# Altium PCB 控制盒基板-布局备份.PcbDoc (part 1 of 2)
Units mil, origin at the board's own origin, x right, y up, seen from the top; angles counter-clockwise.
Board outline 12046.02 x 6189.14 mil, 4 copper layers (Top Layer, SGND, POWER, Bottom Layer); 371 components, 226 nets, 1114 pads, 72 vias.
Unrouted connection lines stored in the file: 329.
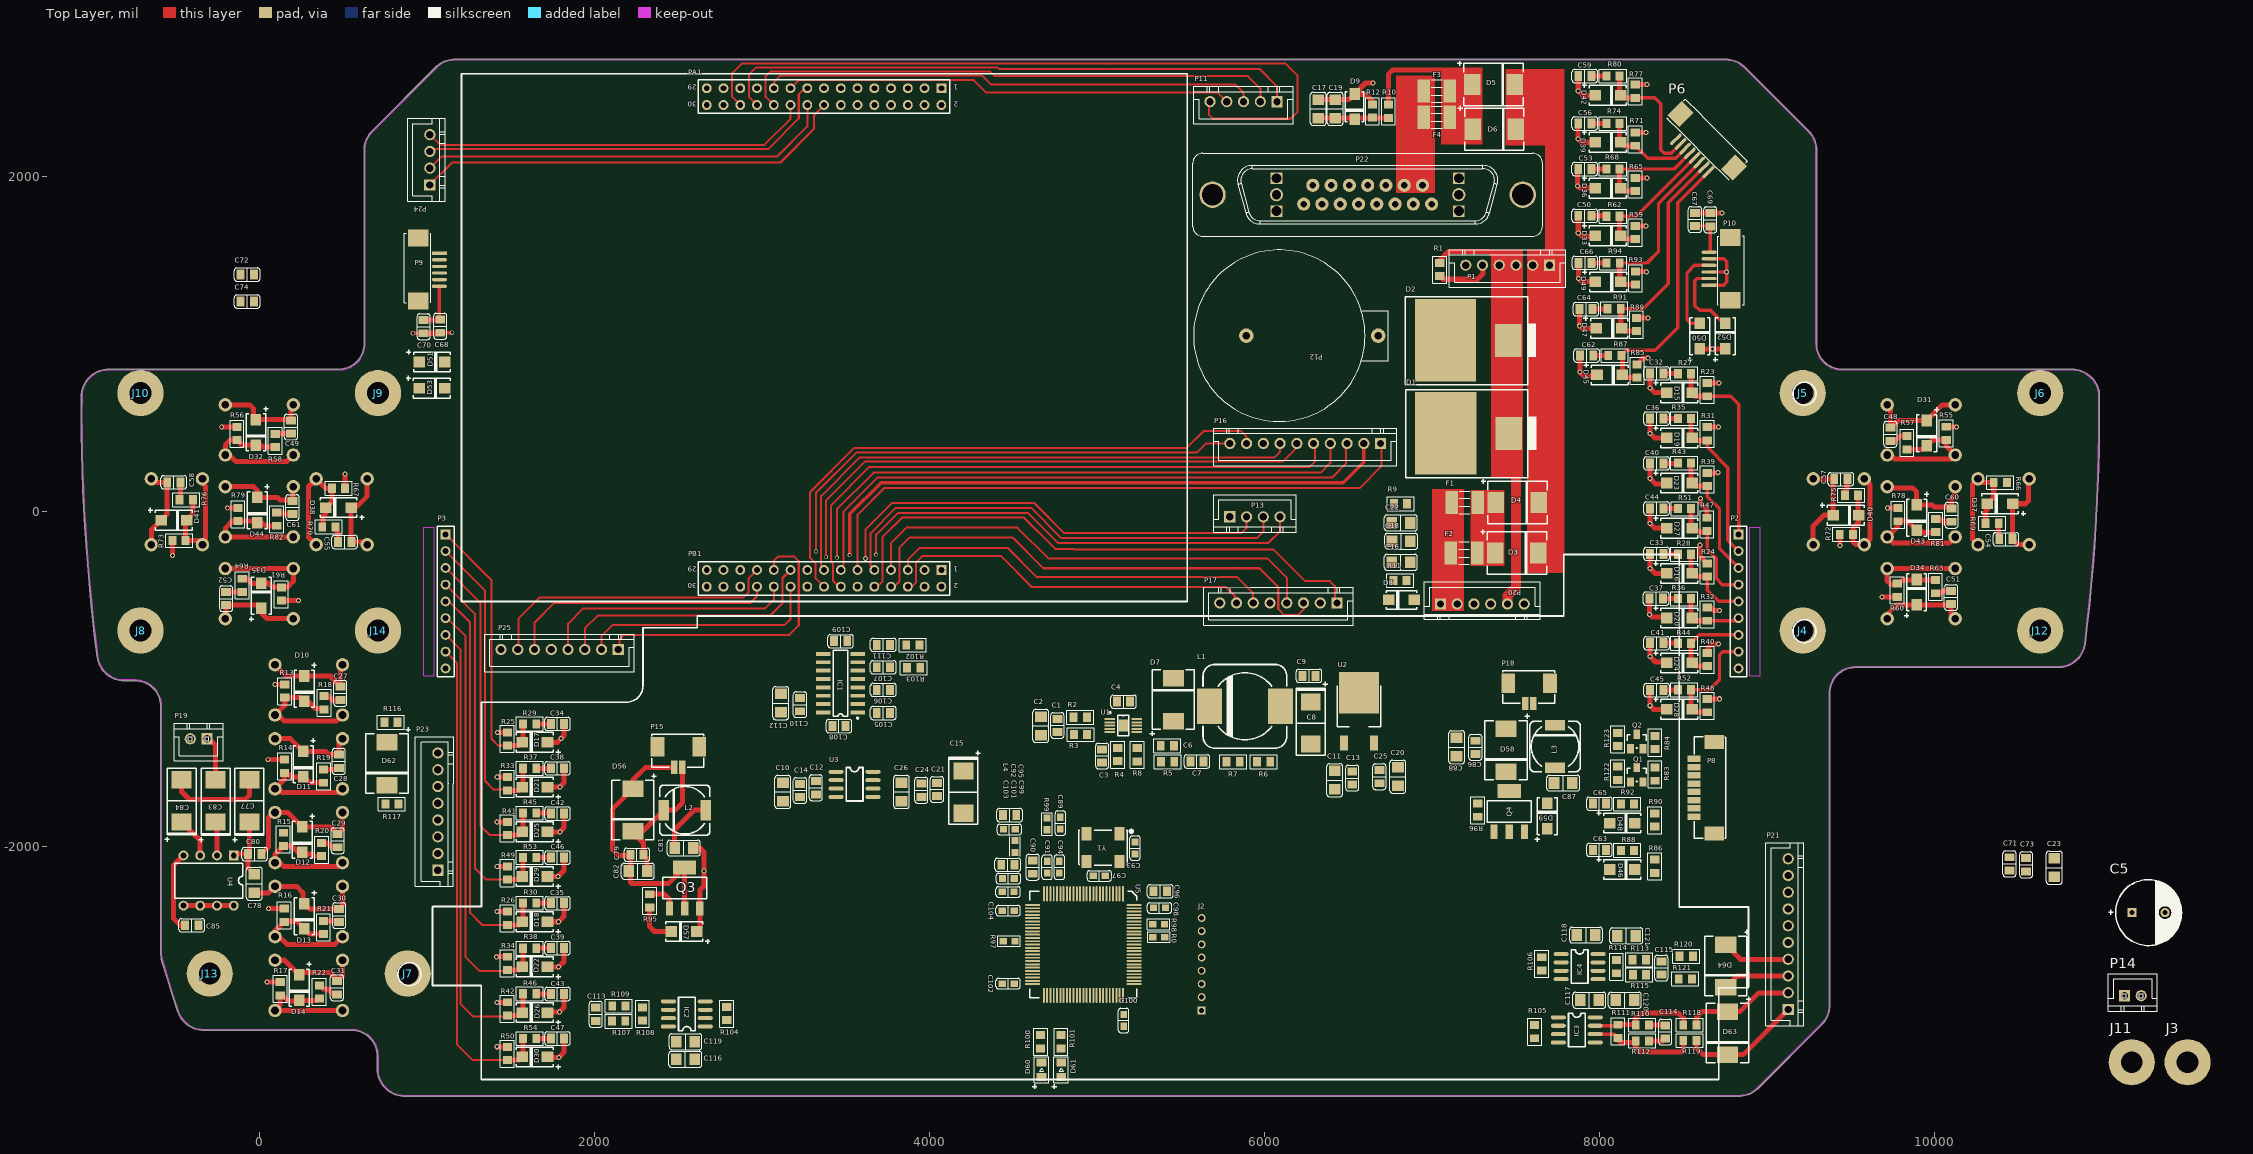
[diagram p0: Top Layer view]
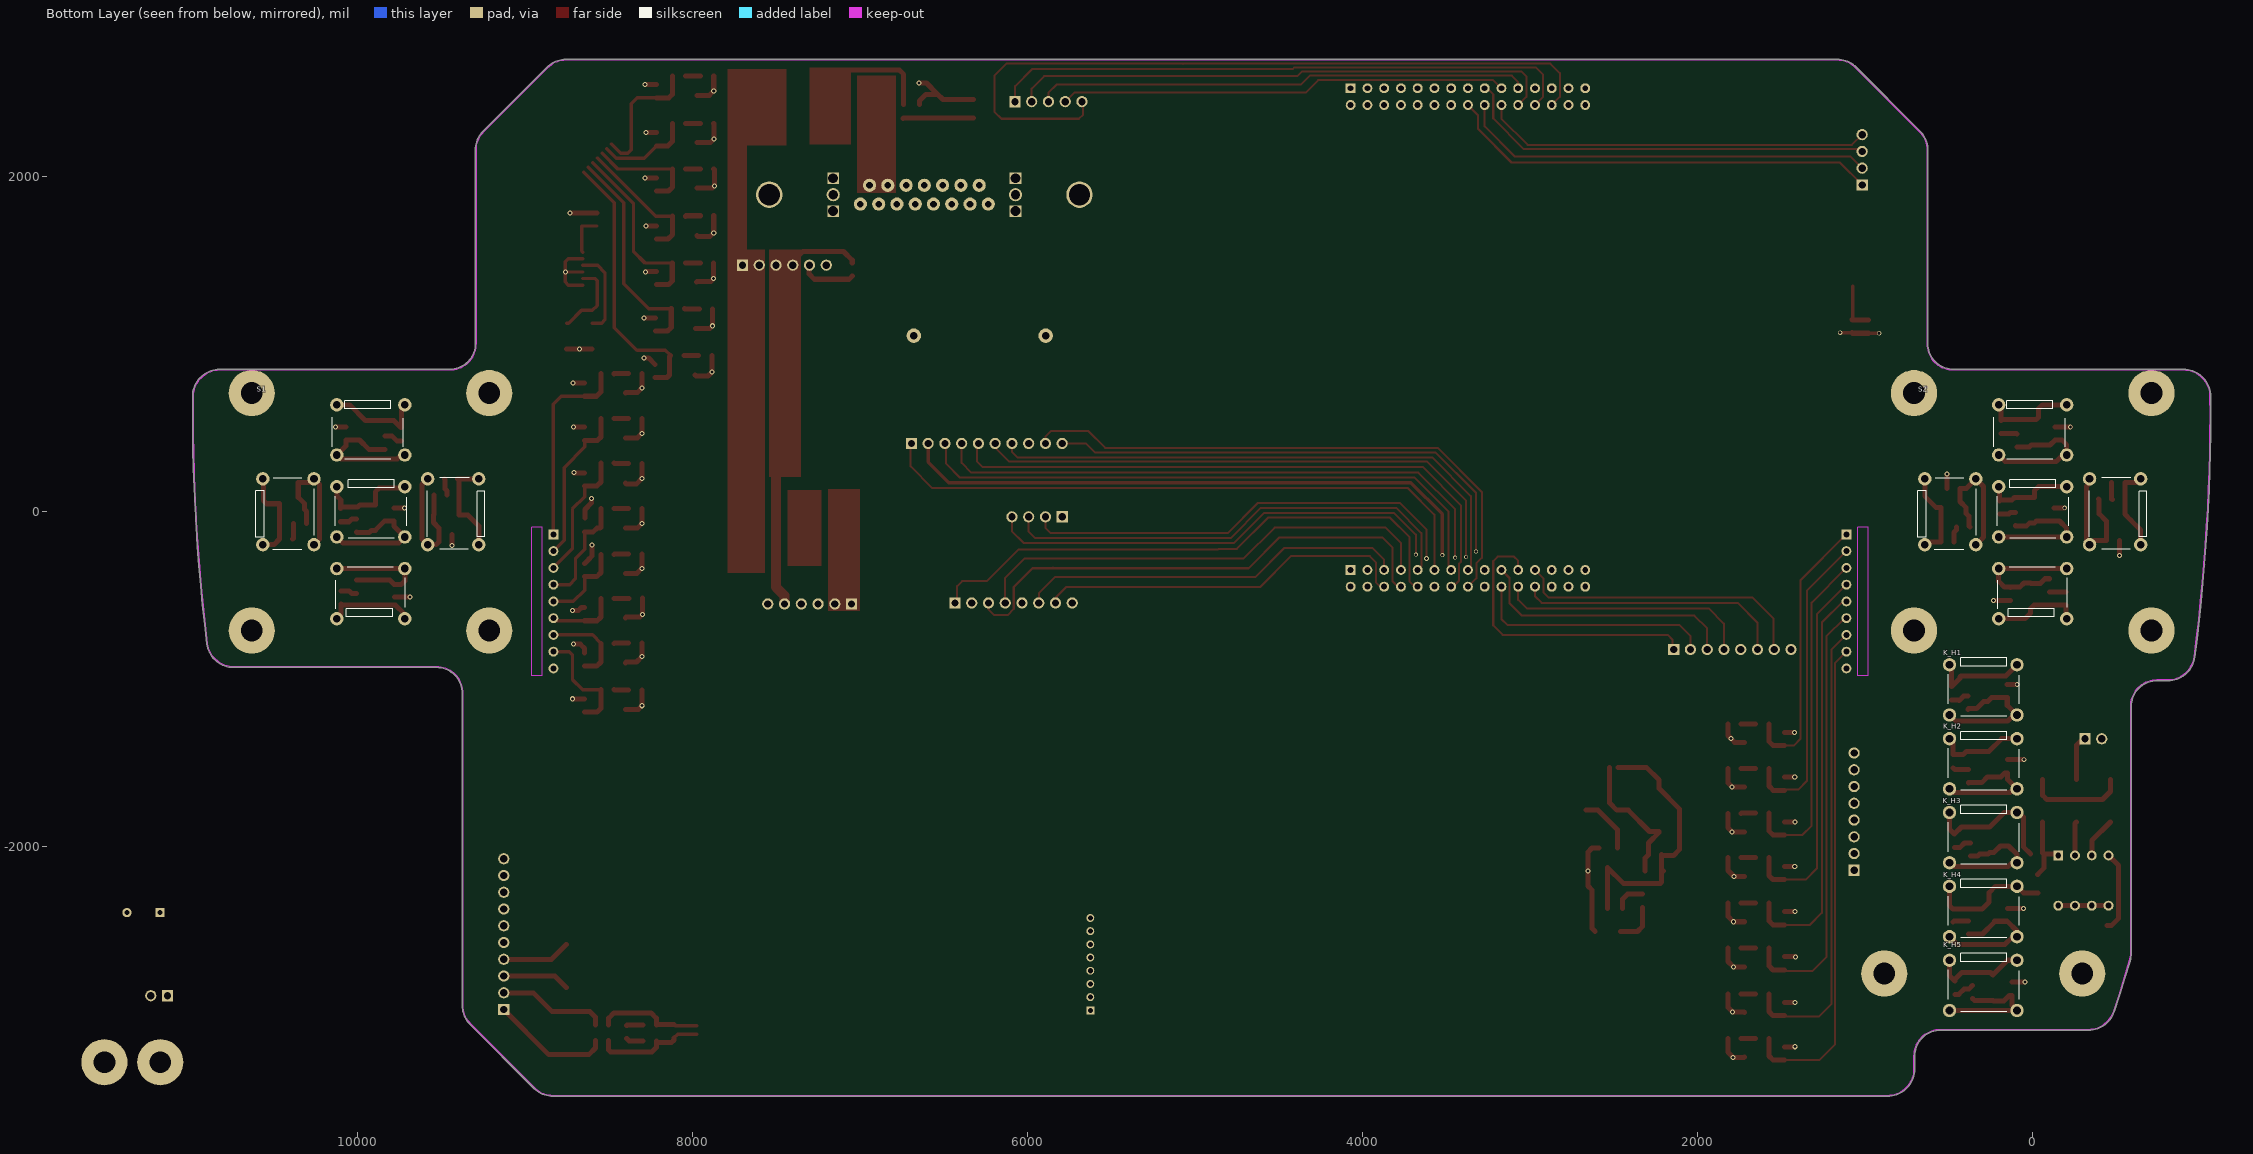
[diagram p1: Bottom Layer view, seen from below]
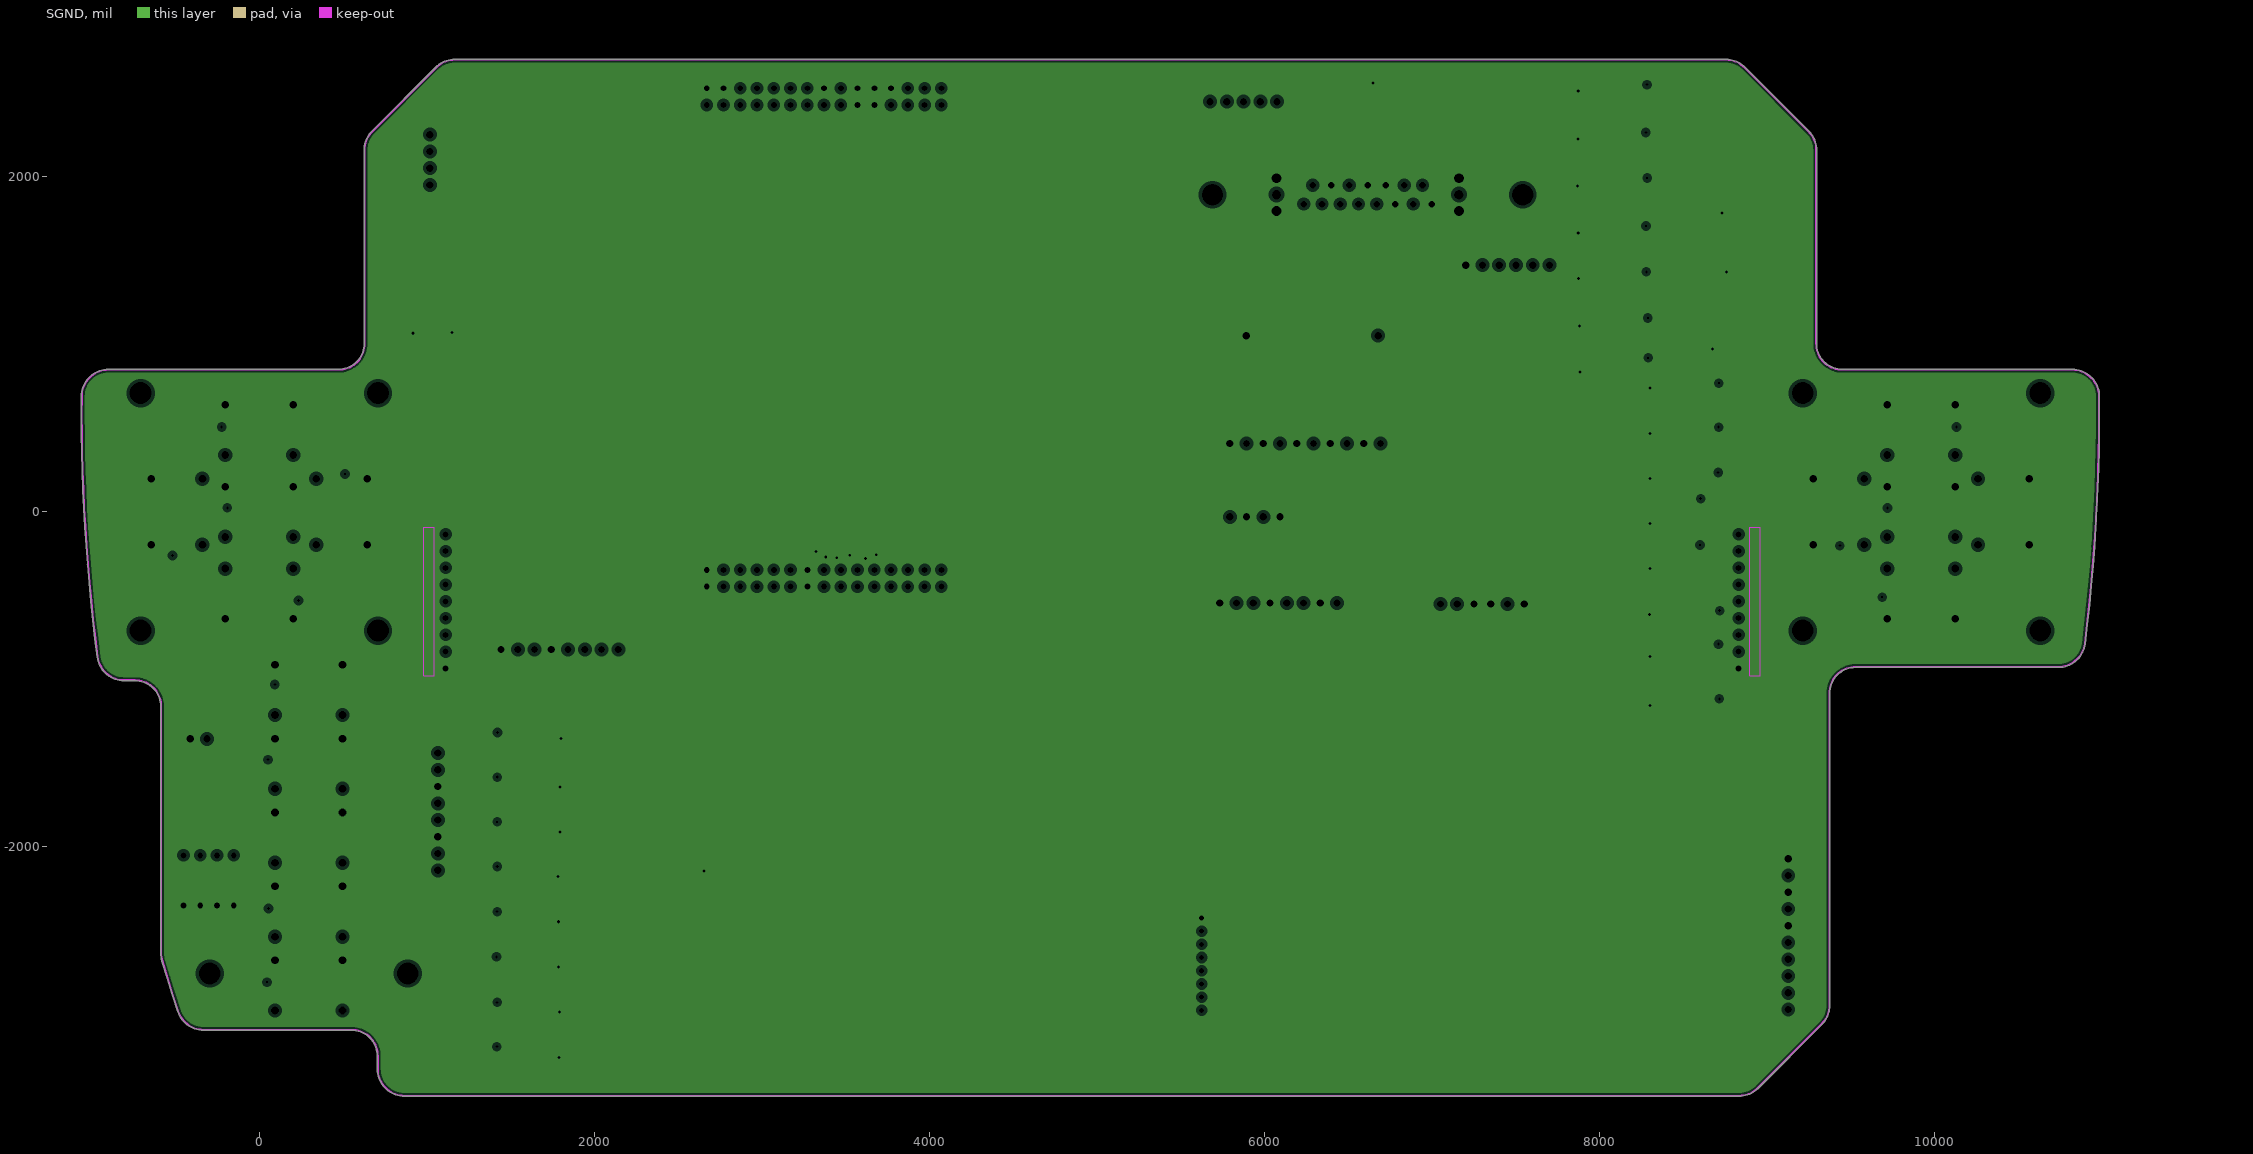
[diagram p2: SGND, clearances drawn from the general rule]

## Layer stack, top to bottom
Top Layer: signal copper 1.4
Dielectric: core 12.6, FR-4, Dk 4.8
SGND: plane copper 1.4, net SGND
Dielectric: prepreg 12.6, FR-4, Dk 4.8
POWER: signal copper 1.4
Dielectric: core 12.6, FR-4, Dk 4.8
Bottom Layer: signal copper 1.4

## Board outline
-588.2,-2634.62 cw(c-426.71,-2634.55) -588.2,-2634.55 -588.2,-1161.42 cw(c-584.19,-1161.42) -588.2,-1161.35 cw(c-741.67,-1161.42) -588.2,-1161.42 -588.2,-1161.35 ccw(c-741.67,-1161.42) -741.62,-1007.95 ccw(c-741.67,-1161.42) -741.67,-1007.95 ccw(c-741.67,-1003.94) -741.62,-1007.95 -741.67,-1007.95 -806.94,-1007.95 cw(c-806.94,-1003.94) -806.99,-1007.95 ccw(c-806.94,-846.46) -806.94,-1007.95 -806.99,-1007.95 cw(c-806.94,-846.46) -967.1,-867.21 cw(c10437.68,610.24) -1062.12,690.1 cw(c-900.63,688.98) -900.72,850.47 cw(c-900.63,846.46) -900.63,850.47 472.44,850.47 cw(c472.44,846.46) 472.53,850.47 ccw(c472.44,1003.94) 625.91,1003.89 ccw(c472.44,1003.94) 625.91,1003.94 625.91,2159.18 cw(c629.92,2159.18) 625.91,2159.23 cw(c787.4,2159.18) 673.21,2273.37 cw(c676.05,2270.53) 673.23,2273.4 673.21,2273.37 1053.4,2653.56 1053.4,2653.57 cw(c1167.59,2539.37) 1167.54,2700.87 cw(c1167.59,2696.85) 1167.59,2700.87 8753.67,2700.87 cw(c8753.67,2696.85) 8753.72,2700.87 ccw(c8753.67,2539.37) 8753.67,2700.87 8753.72,2700.87 cw(c8753.67,2539.37) 8867.87,2653.57 cw(c8865.03,2650.73) 8867.92,2653.51 8867.87,2653.56 8867.92,2653.51 9248.06,2273.37 cw(c9245.22,2270.54) 9248.12,2273.31 ccw(c9133.86,2159.18) 9248.06,2273.37 9248.12,2273.31 cw(c9133.86,2159.18) 9295.36,2159.18 cw(c9291.34,2159.18) 9295.36,2159.13 9295.36,1003.94 ccw(c9291.34,1003.94) 9295.36,1003.99 9295.36,1003.94 ccw(c9448.82,1003.94) 9448.73,850.47 cw(c9448.82,846.46) 9448.82,850.47 10821.9,850.47 cw(c10821.9,846.46) 10821.99,850.47 ccw(c10821.9,688.98) 10821.9,850.47 10821.99,850.47 cw(c10821.9,688.98) 10983.39,690.1 cw(c-516.42,610.24) 10983.66,610.24 cw(c-516.42,610.24) 10898.43,-787.34 cw(c10738.13,-767.72) 10738.19,-929.21 cw(c10738.13,-925.2) 10738.13,-929.21 9527.56,-929.21 cw(c9527.56,-925.2) 9527.5,-929.21 cw(c9527.56,-1082.68) 9527.56,-929.21 9527.5,-929.21 ccw(c9527.56,-1082.68) 9374.1,-1082.68 cw(c9370.08,-1082.68) 9374.1,-1082.74 9374.1,-2946.58 ccw(c9370.08,-2946.58) 9374.1,-2946.52 9374.1,-2946.58 cw(c9212.6,-2946.58) 9326.84,-3060.74 cw(c9212.6,-2946.58) 9326.8,-3060.78 ccw(c9323.96,-3057.94) 9326.84,-3060.74 9326.8,-3060.78 8946.61,-3440.97 cw(c8943.77,-3438.13) 8946.56,-3441.01 ccw(c8832.41,-3326.77) 8946.61,-3440.97 8946.56,-3441.01 cw(c8832.41,-3326.77) 8832.41,-3488.27 866.14,-3488.27 cw(c866.14,-3326.77) 704.65,-3326.84 cw(c866.14,-3326.77) 704.65,-3326.77 704.65,-3248.03 cw(c708.66,-3248.03) 704.65,-3247.97 cw(c551.18,-3248.03) 704.65,-3248.03 704.65,-3247.97 ccw(c551.18,-3248.03) 551.18,-3094.57 cw(c551.18,-3090.55) 551.09,-3094.57 -333.04,-3094.57 ccw(c-333.04,-3090.55) -332.95,-3094.57 -333.04,-3094.57 cw(c-333.04,-2933.07) -486.45,-2983.54 cw(c10437.68,610.24) -581.45,-2680.76 cw(c-426.71,-2634.55)

## Design rules (kind name [scope] priority, off if disabled: settings)
Clearance [All] p1: gap=8
PlaneClearance [All] p1: clearance=20
PlaneConnect [All] p1: planeconnectstyle=Relief reliefexpansion=20 reliefentries=4 reliefconductorwidth=10 reliefairgap=10
PolygonConnect [All] p1: connectstyle=Relief reliefconductorwidth=10 reliefentries=4 polygonreliefangle="90 Angle"
RoutingVias [All] p1: holewidth=28 width=50 viastyle="Through Hole" minholewidth=16 minwidth=23 maxholewidth=50 maxwidth=100
SilkToSilkClearance [All] p1: silktosilkclearance=0
SilkscreenOverComponentPads [All] p1: minsilkscreentomaskgap=0
SolderMaskExpansion [All] p1: expansion=4
Width [All] p1: maxlimit=100 minlimit=8 preferedwidth=10 minimp=50.000000 maximp=50.000000 favimp=50.000000
24 further rules are at their usual default settings.

## Classes and differential pairs
component class TTL_TO_RS485: C113 C114 C115 C116 C117 C118 C119 C120 C121 D62 D63 D64 IC2 IC3 IC4 R104 R105 R106 R107 R108 R109 R110 R111 R112 R113 R114 R115 R116 R117 R118 R119 R120 R121
component class TTL_TO_RS232: C105 C106 C107 C108 C109 C110 C111 C112 IC1 R102 R103
component class RightInterface: P20 P21 P22
component class Processor: C89 C90 C91 C92 C93 C94 C95 C96 C97 C98 C99 C100 C101 C102 C103 C104 D60 D61 J2 L4 R0 R97 R98 R99 R100 R101 U5 Y1
component class PowerManager: C1 C2 C3 C4 C5 C6 C7 C8 C9 C10 C11 C12 C13 C14 C15 C16 C17 C18 C19 C20 C21 C22 C23 C24 C25 C26 D1 D2 D3 D4 D5 D6 D7 D8 D9 F1 F2 F3 F4 L1 P1 R1 R2 R3 R4 R5 R6 R7 R8 R9 R10 R11 R12 U1 U2 U3
component class OmapSystem: C77 C78 C79 C80 C81 C82 C83 C84 C85 C86 C87 C88 D56 D57 D58 D59 L2 L3 P11 P12 P13 P14 P15 P16 P17 P18 P19 PA1 PB1 Q3 Q4 R95 R96 U4
component class LeftInterface: P23 P24 P25
component class KeyInput_MG: C62 C63 C64 C65 C66 D45 D46 D47 D48 D49 P6 P8 Q1 Q2 R83 R84 R85 R86 R87 R88 R89 R90 R91 R92 R93 R94 R122 R123
component class KeyInput_IJMEF: C48 C49 C50 C51 C52 C53 C54 C55 C56 C57 C58 C59 C60 C61 D31 D32 D33 D34 D35 D36 D37 D38 D39 D40 D41 D42 D43 D44 R55 R56 R57 R58 R59 R60 R61 R62 R63 R64 R65 R66 R67 R68 R69 R70 R71 R72 R73 R74 R75 R76 R77 R78 R79 R80 R81 R82 S1 S2
component class KeyInput_ABH: C27 C28 C29 C30 C31 C32 C33 C34 C35 C36 C37 C38 C39 C40 C41 C42 C43 C44 C45 C46 C47 D10 D11 D12 D13 D14 D15 D16 D17 D18 D19 D20 D21 D22 D23 D24 D25 D26 D27 D28 D29 D30 K_H1 K_H2 K_H3 K_H4 K_H5 P2 P3 R13 R14 R15 R16 R17 R18 R19 R20 R21 R22 R23 R24 R25 R26 R27 R28 R29 R30 R31 R32 R33 R34 R35 R36 R37 R38 R39 R40 R41 R42 R43 R44 R45 R46 R47 R48 R49 R50 R51 R52 R53 R54
component class JoyStickAdcInput: C67 C68 C69 C70 C71 C72 C73 C74 D50 D51 D52 D53 P9 P10
component class FrameWork: J3 J4 J5 J6 J7 J8 J9 J10 J11 J12 J13 J14

## Components (designator, comment, footprint, x,y, rotation, side; value= is the part's Value field where it differs from the comment)
C1 "0.1uF" C0805 4764,-1275 r90 top
C2 "10uF" C1206 4665,-1278 r90 top
C3 "15nF" C0805 5031,-1457 r90 top
C4 "0.1uF" C0805 5159,-1133 r180 top
C5 "470uF/50V" CAP-50V/470U 11276.88,-2392.4 r0 top
C6 "22pF" R0805 5420,-1397 r180 top
C7 "2200pF" C0805 5597,-1490.03 r0 top
C8 "100uF, 16V" CT7343-E 6276,-1261 r270 top
C9 "0.1uF" C0805 6266,-979 r0 top
C10 "22uF" C1206 3124.96,-1672 r90 top
C11 "22uF" C1206 6419,-1602 r270 top
C12 "0.1uF" C0805 3321.96,-1647 r90 top
C13 "0.1uF" C0805 6524,-1589 r90 top
C14 "100pF" C0805 3227.96,-1663 r90 top
C15 "100uF/16V" CT7343-E 4203,-1673 r270 top
C16 "10uF" C1206 6814,-301 r180 top
C17 "10uF" C1206 6321,2405.19 r270 top
C18 "0.1uF" C1206 6816,-176 r180 top
C19 "0.1uF" C1206 6422,2405.19 r270 top
C20 "22uF" C1206 6796,-1581 r270 top
C21 "100pF" C0805 4044.96,-1657 r90 top
C22 "100pF" C1206 6814,-66 r180 top
C23 "100pF" C1206 10714,-2124 r270 top
C24 "0.1uF" C0805 3951.96,-1662 r90 top
C25 "0.1uF" C0805 6686,-1581 r90 top
C26 "22uF" C1206 3832.96,-1672 r90 top
C27 "100pF" C0805 484,-1083 r90 top
C28 "100pF" C0805 475,-1489 r90 top
C29 "100pF" C0805 468,-1963 r90 top
C30 "100pF" C0805 477,-2410 r90 top
C31 "100pF" C0805 464,-2841 r90 top
C32 "100pF" C0805 8341,826 r180 top
C33 "100pF" C0805 8341,-251 r180 top
C34 "100pF" C0805 1780,-1266 r0 top
C35 "100pF" C0805 1780,-2336 r0 top
C36 "100pF" C0805 8341,557 r180 top
C37 "100pF" C0805 8338,-518 r180 top
C38 "100pF" C0805 1780,-1531 r0 top
C39 "100pF" C0805 1780,-2604 r0 top
C40 "100pF" C0805 8341,289 r180 top
C41 "100pF" C0805 8341,-784 r180 top
C42 "100pF" C0805 1780,-1801 r0 top
C43 "100pF" C0805 1780,-2878 r0 top
C44 "100pF" C0805 8341,20 r180 top
C45 "100pF" C0805 8341,-1064 r180 top
C46 "100pF" C0805 1780,-2064 r0 top
C47 "100pF" C0805 1780,-3144 r0 top
C48 "100pF" C0805 9736,463 r90 top
C49 "100pF" C0805 189,506 r90 top
C50 "100pF" C0805 7912,1767 r180 top
C51 "100pF" C0805 10098,-511 r270 top
C52 "100pF" C0805 -198,-518 r270 top
C53 "100pF" C0805 7912,2046 r180 top
C54 "100pF" C0805 10425,-163 r0 top
C55 "100pF" C0805 510,-180 r0 top
C56 "100pF" C0805 7912,2318 r180 top
C57 "100pF" C0805 9440,195 r180 top
C58 "100pF" C0805 -510,176 r180 top
C59 "100pF" C0805 7912,2601 r180 top
C60 "100pF" C0805 10101,-20 r90 top
C61 "100pF" C0805 198,26 r90 top
C62 "100pF" C0805 7923,933 r180 top
C63 "100pF" C0805 7999,-2018 r180 top
C64 "100pF" C0805 7919,1210 r180 top
C65 "100pF" C0805 7999,-1742 r180 top
C66 "100pF" C0805 7913,1486 r180 top
C67 "100pF" C0805 8569.34,1745.03 r90 top
C68 "100pF" C0805 1080,1108 r270 top
C69 "1uF" C0805 8661,1743.37 r90 top
C70 "1uF" C0805 981,1105 r270 top
C71 "100pF" C0805 10446.66,-2101.34 r90 top
C72 "100pF" C0805 -72,1416 r0 top
C73 "100pF" C0805 10546,-2107 r90 top
C74 "100pF" C0805 -72,1255 r0 top
C77 "470uF/35V" CT7343-E -59,-1725 r90 top
C78 "10uF" C1206 -30,-2219 r90 top
C79 "0.1uF" C0805 2254,-2047 r0 top
C80 "0.1uF" C0805 -27,-2043 r180 top
C81 "10uF" C1206 2534,-2007 r180 top
C82 "10uF" C1206 2260,-2145 r180 top
C83 "470uF/35V" CT7343-E -261,-1725 r90 top
C84 "47uF/35V" CT7343-D -464,-1725 r90 top
C85 "0.1uF" C0805 -403,-2468 r180 top
C86 "0.1uF" C0805 7259,-1406 r270 top
C87 "10uF" C1206 7783,-1619 r180 top
C88 "10uF" C1206 7147,-1405 r90 top
C89 "0.1uF" C0603 4781,-1858 r90 top
C90 "10uF" C0805 4617,-2121 r90 top
C91 "0.1uF" C0603 4703,-2121 r90 top
C92 "0.1uF" C0603 4477,-1896 r0 top
C93 "0.1uF" C0603 5227,-2007 r270 top
C94 "0.1uF" C0603 4776,-2121 r90 top
C95 "10uF" C0805 4479,-1810 r0 top
C96 "10uF" C0805 5378,-2265 r0 top
C97 "0.1uF" C0603 5014,-2173 r0 top
C98 "0.1uF" C0603 5373,-2364 r0 top
C99 "10uF" C0805 4468,-2107 r0 top
C100 "0.1uF" C0603 5159,-3036 r270 top
C101 "0.1uF" C0603 4471,-2189 r0 top
C102 "0.1uF" C0603 4470.09,-2816 r180 top
C103 "100pF" C0603 4470,-2269 r0 top
C104 "0.1uF" C0603 4470.09,-2381 r180 top
C105 "0.1uF" C0805 3725,-1201 r180 top
C106 "0.1uF" C0805 3725,-1063 r180 top
C107 "15pF" C0805 3725,-928 r0 top
C108 "0.1uF" C0805 3460,-1279 r0 top
C109 "15pF" C0805 3470,-772 r180 top
C110 "0.1uF" C0805 3228,-1151 r270 top
C111 "15pF" C0805 3725,-794 r0 top
C112 "10uF" C1206 3113,-1142 r270 top
C113 "0.1uF" C0805 2008.04,-2999 r90 top
C114 "0.1uF" C0805 8392,-3105 r270 top
C115 "0.1uF" C0805 8369,-2723 r270 top
C116 "10uF" C1206 2543.04,-3268 r180 top
C117 "10uF" C1206 7939,-2915 r0 top
C118 "10uF" C1206 7919,-2526 r0 top
C119 "0.1uF" C1206 2544.04,-3163 r180 top
C120 "0.1uF" C1206 8151,-2915 r180 top
C121 "0.1uF" C1206 8160,-2531 r180 top
D1 "SM8S14A" DO-218AB 7082,468 r0 top
D2 "SM8S14A" DO-218AB 7080,1023 r0 top
D3 "MBRS410LT3" SMC 7506,-246 r0 top
D4 "MBRS410LT3" SMC 7509.6,55.12 r0 top
D5 "MBRS410LT3" SMC 7367,2550 r0 top
D6 "MBRS410LT3" SMC 7371,2283 r0 top
D7 "MBRS3201T3G" SMC 5456,-1121 r90 top
D8 "1SMA5.0AT3G" SMA-S 6817.4,-525.12 r180 top
D9 "1SMA5.0AT3G" SMA-S 6538,2418 r270 top
D10 "1SMA5.0AT3G" SMA 268,-1056 r270 top
D11 "1SMA5.0AT3G" SMA 262,-1506 r270 top
D12 "1SMA5.0AT3G" SMA 257,-1957 r270 top
D13 "1SMA5.0AT3G" SMA 269,-2414 r270 top
D14 "1SMA5.0AT3G" SMA 238,-2840 r270 top
D15 "1SMA5.0AT3G" SMA 8476,710 r0 top
D16 "1SMA5.0AT3G" SMA 8476,-368 r0 top
D17 "1SMA5.0AT3G" SMA 1644.53,-1376 r180 top
D18 "1SMA5.0AT3G" SMA 1644.53,-2447 r180 top
D19 "1SMA5.0AT3G" SMA 8476,441 r0 top
D20 "1SMA5.0AT3G" SMA 8476,-634 r0 top
D21 "1SMA5.0AT3G" SMA 1644.53,-1643 r180 top
D22 "1SMA5.0AT3G" SMA 1644.53,-2716 r180 top
D23 "1SMA5.0AT3G" SMA 8476,172 r0 top
D24 "1SMA5.0AT3G" SMA 8476,-902 r0 top
D25 "1SMA5.0AT3G" SMA 1644.53,-1910 r180 top
D26 "1SMA5.0AT3G" SMA 1644.53,-2989 r180 top
D27 "1SMA5.0AT3G" SMA 8476,-98 r0 top
D28 "1SMA5.0AT3G" SMA 8476,-1179 r0 top
D29 "1SMA5.0AT3G" SMA 1644.53,-2177 r180 top
D30 "1SMA5.0AT3G" SMA 1644.53,-3254 r180 top
D31 "1SMA5.0AT3G" SMA 9952,469 r270 top
D32 "1SMA5.0AT3G" SMA -20,474 r270 top
D33 "1SMA5.0AT3G" SMA 8049.47,1648 r0 top
D34 "1SMA5.0AT3G" SMA 9892,-480 r90 top
D35 "1SMA5.0AT3G" SMA 12,-501 r90 top
D36 "1SMA5.0AT3G" SMA 8049.47,1932 r0 top
D37 "1SMA5.0AT3G" SMA 10390,48 r180 top
D38 "1SMA5.0AT3G" SMA 473,25 r180 top
D39 "1SMA5.0AT3G" SMA 8049.47,2205 r0 top
D40 "1SMA5.0AT3G" SMA 9470,-20 r0 top
D41 "1SMA5.0AT3G" SMA -510,-50 r0 top
D42 "1SMA5.0AT3G" SMA 8049.47,2486 r0 top
D43 "1SMA5.0AT3G" SMA 9893,-35 r270 top
D44 "1SMA5.0AT3G" SMA -12,10 r270 top
D45 "1SMA5.0AT3G" SMA 8060.47,817 r0 top
D46 "1SMA5.0AT3G" SMA 8135.47,-2135 r0 top
D47 "1SMA5.0AT3G" SMA 8056.47,1095 r0 top
D48 "1SMA5.0AT3G" SMA 8135.47,-1858 r0 top
D49 "1SMA5.0AT3G" SMA 8050.47,1372 r0 top
D50 "1SMA5.0AT3G" SMA 8598.34,1048.66 r90 top
D51 "1SMA5.0AT3G" SMA 1031,894 r0 top
D52 "1SMA5.0AT3G" SMA 8750.34,1048.66 r90 top
D53 "1SMA5.0AT3G" SMA 1030,738 r0 top
D56 "1.5SMC15AT3G" SMC 2230,-1780 r270 top
D57 "1SMA5.0AT3G" SMA 2536,-2505 r180 top
D58 "1.5SMC15AT3G" SMC 7442,-1423 r270 top
D59 "1SMA5.0AT3G" SMA 7687,-1816 r90 top
D60 "LED-G" LED0805 4669,-3330.04 r90 top
D61 "LED-G" LED0805 4786.6,-3330.04 r90 top
D62 "1.5SMC6.8CA" SMC 762,-1503 r270 top
D63 "1.5SMC6.8CA" SMC 8764,-3112 r270 top
D64 "1.5SMC6.8CA" SMC 8753,-2711 r270 top
F1 "2A" F1812 7195,56 r0 top
F2 "2A" F1812 7190,-247 r0 top
F3 "2A" F1812 7028,2511 r0 top
F4 "2A" F1812 7028,2355 r0 top
IC1 "SP3232EEN" SO16-150 3469,-1023 r90 top
IC2 "SP3078EEN-L/TR" SO-8 2662.04,-3072 r180 top
IC3 "SP3078EEN-L/TR" SO-8 7754,-3018 r0 top
IC4 "SP3078EEN-L/TR" SO-8 7771,-2640 r0 top
J2 "HD1X8-2.00" SHD1X8-2.00 5625,-2700 r90 top
J3 "Socket" HT-M3#1 11509.88,-3285.4 r0 top
J4 "Socket" HT-M3#2 8137,-887 r0 top locked
J5 "Socket" HT-M3#3 8830,1001 r0 top locked
J6 "Socket" HT-M3#4 10525,1203 r0 top locked
J7 "Socket" HT-M3#5 1397,-2759 r0 top locked
J8 "Socket" HT-M3#6 -610,-936 r0 top locked
J9 "Socket" HT-M3#1 708.66,708.66 r0 top locked
J10 "Socket" HT-M3#7 -788,461 r0 top locked
J11 "Socket" HT-M3#1 11175.88,-3285.4 r0 top
J12 "Socket" HT-M3#8 10699,-1253 r0 top locked
J13 "Socket" HT-M3#9 -545,-2431 r0 top locked
J14 "Socket" HT-M3#10 1339,-723 r0 top locked
K_H1 "SW4" SW-MEC 295.28,-1062.99 r180 bottom locked
K_H2 "SW4" SW-MEC 295.28,-1503.94 r180 bottom locked
K_H3 "SW4" SW-MEC 295.28,-1944.88 r180 bottom locked
K_H4 "SW4" SW-MEC 295.28,-2385.83 r180 bottom locked
K_H5 "SW4" SW-MEC 295.28,-2826.77 r180 bottom locked
L1 "15uH,1.5A" L5050-P 5883,-1161 r0 top
L2 "15uH,1.5A" L3030-P 2540,-1781 r0 top
L3 "15uH,1.5A" L3030-P 7734,-1401 r270 top
L4 "10uH" L0603-C 4511,-1998 r270 top
P1 "Header 6" DS1X6-2.54 7451,1472 r180 top
P2 "KEY_A" HDR1X9 8829.73,-134.96 r270 top locked
P3 "KEY_A" HDR1X9 1112.4,-134.96 r270 top locked
P6 "Header 8" FFC/SM1.0-8 8602,2176 r135 top
P8 "SMT-8P" 1MM25_8PIN_SMT_R90 8664,-1682 r90 top
P9 "Header 6" FFC/SM1.0-6 1012,1446 r270 top
P10 "Header 6" FFC/SM1.0-6 8717,1450 r90 top
P11 "五线触摸屏接口" DS1X5-2.54 5875,2448 r180 top
P12 "RTC备用电池" CR2428 6285,1051 r270 top
P13 "备用视频输入输出" DS1X4-2.54 5942.87,-30 r0 top
P14 "备用CAN接口" DS1X2-2.54 11182.88,-2888.4 r0 top
P15 "振动电机1" 1MM25_2PIN_SMT_R90 2501,-1464 r180 top
P16 "Header 10" DS1X10-2.54 6243,408 r180 top
P17 "音频接口" DS1X8-2.54 6133,-544 r180 top
P18 "振动电机2" 1MM25_2PIN_SMT_R90 7580,-1084 r180 top
P19 "8R 喇叭接口" DS1X2-2.54 -362,-1355 r180 top
P20 "Header 6" DS1X6-2.54 7300,-550 r0 top
P21 "Header 10" DS1X10-2.54 9126,-2521 r90 top
P22 "17W2" 17W2_FEMALE 6615.66,1892.66 r0 top
P23 "Header 8" DS1X8-2.54 1066,-1840 r90 top
P24 "Header 4" DS1X4-2.54 1018,2101 r90 top
P25 "Header 8" DS1X8-2.54 1843,-822 r180 top
PA1 "Header 15X2" HDR2X15 4071,2528 r180 top locked
PB1 "Header 15X2" HDR2X15 4071,-347 r180 top locked
Q1 "8050" SOT-23 8222,-1570 r0 top
Q2 "8050" SOT-23 8222,-1371 r0 top
Q3 "BCP54" SOT-223 2539,-2245 r0 top
Q4 "BCP54" SOT-223 7461,-1788 r0 top
R0 "0K" R0603 5369,-2539 r180 top
R1 "1K" R0805 7046,1446 r270 top
R2 "348K" R0805 4900,-1226 r0 top
R3 "64.9K" R0805 4902,-1329 r0 top
R4 "205K" R0805 5124,-1449 r90 top
R5 "35.7K,1%" R0805 5422,-1492 r180 top
R6 "53.6K,1%" R0805 5995,-1492 r0 top
R7 "10K" R0805 5813,-1492 r0 top
R8 "10K" R0805 5241,-1450 r270 top
R9 "100K" R0805 6812,48 r180 top
R10 "100K" R0805 6740,2391 r270 top
R11 "10K" R0805 6809,-410 r0 top
R12 "10K" R0805 6645,2392 r90 top
R13 "4.7K" R0805 152,-1070 r90 top
R14 "4.7K" R0805 151,-1519 r90 top
R15 "4.7K" R0805 144,-1955 r90 top
R16 "4.7K" R0805 149,-2408 r90 top
R17 "4.7K" R0805 125,-2847 r90 top
R18 "0.33K" R0805 387,-1140 r270 top
R19 "0.33K" R0805 384,-1578 r270 top
R20 "0.33K" R0805 372,-2016 r270 top
R21 "0.33K" R0805 383,-2481 r270 top
R22 "0.33K" R0805 359,-2866 r270 top
R23 "4.7K" R0805 8643,729 r90 top
R24 "4.7K" R0805 8643,-348 r90 top
R25 "4.7K" R0805 1481,-1356 r90 top
R26 "4.7K" R0805 1481,-2426 r90 top
R27 "0.33K" R0805 8506.53,824 r0 top
R28 "0.33K" R0805 8506.53,-254 r0 top
R29 "0.33K" R0805 1614,-1266 r180 top
R30 "0.33K" R0805 1614,-2335 r180 top
R31 "4.7K" R0805 8643,466 r90 top
R32 "4.7K" R0805 8643,-611 r90 top
R33 "4.7K" R0805 1481,-1623 r90 top
R34 "4.7K" R0805 1481,-2695 r90 top
R35 "0.33K" R0805 8506.53,557 r0 top
R36 "0.33K" R0805 8506.53,-518 r0 top
R37 "0.33K" R0805 1614,-1531 r180 top
R38 "0.33K" R0805 1614,-2605 r180 top
R39 "4.7K" R0805 8643,193 r90 top
R40 "4.7K" R0805 8643,-882 r90 top
R41 "4.7K" R0805 1481,-1890 r90 top
R42 "4.7K" R0805 1481,-2967 r90 top
R43 "0.33K" R0805 8506.53,291 r0 top
R44 "0.33K" R0805 8506.53,-785 r0 top
R45 "0.33K" R0805 1614,-1798 r180 top
R46 "0.33K" R0805 1614,-2877 r180 top
R47 "4.7K" R0805 8641,-75 r90 top
R48 "4.7K" R0805 8643,-1157 r90 top
R49 "4.7K" R0805 1481,-2156 r90 top
R50 "4.7K" R0805 1481,-3234 r90 top
R51 "0.33K" R0805 8507,19 r0 top
R52 "0.33K" R0805 8506.53,-1062 r0 top
R53 "0.33K" R0805 1614,-2063 r180 top
R54 "0.33K" R0805 1614,-3144 r180 top
R55 "4.7K" R0805 10069,468 r90 top
R56 "4.7K" R0805 -133,467 r90 top
R57 "0.33K" R0805 9835,412 r270 top
R58 "0.33K" R0805 95,425 r270 top
R59 "4.7K" R0805 8213,1667 r90 top
R60 "4.7K" R0805 9777,-468 r270 top
R61 "4.7K" R0805 132,-491 r270 top
R62 "0.33K" R0805 8080,1764 r0 top
R63 "0.33K" R0805 10005,-447 r90 top
R64 "0.33K" R0805 -101,-439 r90 top
R65 "4.7K" R0805 8213,1954 r90 top
R66 "4.7K" R0805 10392,175 r0 top
R67 "4.7K" R0805 473,140 r0 top
R68 "0.33K" R0805 8080,2046 r0 top
R69 "0.33K" R0805 10343,-69 r180 top
R70 "0.33K" R0805 415,-90 r180 top
R71 "4.7K" R0805 8213,2224 r90 top
R72 "4.7K" R0805 9473,-135 r180 top
R73 "4.7K" R0805 -479,-171 r180 top
R74 "0.33K" R0805 8080,2318 r0 top
R75 "0.33K" R0805 9503,99 r0 top
R76 "0.33K" R0805 -436,72 r0 top
R77 "4.7K" R0805 8213,2510 r90 top
R78 "4.7K" R0805 9781,-17 r90 top
R79 "4.7K" R0805 -127,-16 r90 top
R80 "0.33K" R0805 8080,2601 r0 top
R81 "0.33K" R0805 10006,-82 r270 top
R82 "0.33K" R0805 104,-44 r270 top
R83 "1K" R0805 8331,-1566 r270 top
R84 "1K" R0805 8331,-1377 r90 top
R85 "4.7K" R0805 8224,841 r90 top
R86 "4.7K" R0805 8329.53,-2116 r90 top
R87 "0.33K" R0805 8091,933 r0 top
R88 "0.33K" R0805 8166,-2021 r0 top
R89 "4.7K" R0805 8220,1118 r90 top
R90 "4.7K" R0805 8329.53,-1840 r90 top
R91 "0.33K" R0805 8087,1212 r0 top
R92 "0.33K" R0805 8166,-1744 r0 top
R93 "4.7K" R0805 8214,1395 r90 top
R94 "0.33K" R0805 8081,1485 r0 top
R95 "1K" R0805 2330,-2322 r270 top
R96 "1K" R0805 7273,-1781 r90 top
R97 "10K" R0603 4476,-2563 r180 top
R98 "10K" R0603 5368.16,-2462 r180 top
R99 "10K" R0603 4702,-1863 r270 top
R100 "470R" R0805 4663.6,-3163.04 r270 top
R101 "470R" R0805 4785.6,-3163.04 r270 top
R102 "4.7R" R0805 3901,-795 r0 top
R103 "4.7R" R0805 3906,-931 r0 top
R104 "10K" R0805 2790.04,-2995 r90 top
R105 "10K" R0805 7612,-3103 r90 top
R106 "10K" R0805 7655,-2698 r90 top
R107 "2K" R0805 2145.04,-3040 r180 top
R108 "120R(不焊)" R0805 2287.04,-2997 r270 top
R109 "2K" R0805 2146.04,-2950 r0 top
R110 "2K" R0805 8255,-3063 r0 top
R111 "120R(不焊)" R0805 8110,-3101 r90 top
R112 "2K" R0805 8255,-3158 r180 top
R113 "2K" R0805 8237,-2674 r0 top
R114 "120R(不焊)" R0805 8101,-2715 r90 top
R115 "2K" R0805 8238,-2763 r180 top
R116 "10R" R0805 786,-1256 r0 top
R117 "10R" R0805 792,-1744 r0 top
R118 "10R" R0805 8539,-3063 r180 top
R119 "10R" R0805 8539,-3156 r180 top
R120 "10R" R0805 8517,-2653 r180 top
R121 "10R" R0805 8512,-2788 r180 top
R122 "1K" R0805 8109,-1560.84 r270 top
R123 "1K" R0805 8108,-1358.84 r270 top
S1 "SW-4" SW-MEC-5 9919.53,0 r180 bottom locked
S2 "SW-4" SW-MEC-5 0,0 r180 bottom locked
U1 "TPS54160-C1" TSSO3X5-G10 5157,-1276 r0 top
U2 "MC33275DT-3.3" TO-252 6564,-1381 r0 top
U3 "REF192" SO-8 3442.96,-1552 r0 top
U4 "TDA7267" DIP8 -303,-2202 r180 top
U5 "STM32F103VCT6" STM32F103VCT6 4919,-2583 r270 top
Y1 "XTAL 8MHz" "XTAL 5.0X7.0-SM" 5036,-2004 r180 top

## Footprints (in the part's own frame and the unit in brackets; to place one, negate y for a bottom-side part, rotate by r counter-clockwise, add the part's x,y. Pads: shape width x height; smd on the part's side, far side on the other; paste and mask are expansions set on the pad)
1MM25_2PIN_SMT_R90 [mm]
  rect 1x2 smd: 1(-0.625,1.55) 2(0.625,1.55)
  rect 2.1x3 smd: 3(-3.175,-1.55) 4(3.175,-1.55)
  silkscreen extent -3.9,-3.43 4.02,1.52
1MM25_8PIN_SMT_R90 [mm]
  rect 1x2 smd: 1(-3.496,2.566) 2(-2.246,2.566) 3(-0.996,2.566) 4(0.254,2.566) 5(1.504,2.566) 6(2.754,2.566) 7(4.004,2.566) 8(5.254,2.566)
  rect 2.1x3 smd: 8(-6.046,-0.534) 9(7.804,-0.534)
  silkscreen extent -6.77,-2.27 8.62,2.54
17W2_FEMALE [mm]
  round 4 hole 3.2: 0(-23.52,0) 0(23.52,0)
  round 2 hole 1: 1(8.31,1.42) 2(5.54,1.42) 3(2.77,1.42) 4(0,1.42) 5(-2.77,1.42) 6(-5.54,1.42) 7(-8.31,1.42) 8(9.695,-1.42) 9(6.925,-1.42) 10(4.155,-1.42) 11(1.385,-1.42) 12(-1.385,-1.42) 13(-4.155,-1.42) 14(-6.925,-1.42) 15(-9.695,-1.42)
  round 2 hole 1.4: 16(13.82,0) 18(-13.82,0)
  rect 1.8x1.8 hole 1.5: 17(13.82,-2.5) 17(13.82,2.5) 19(-13.82,-2.5) 19(-13.82,2.5)
  silkscreen extent -26.52,-6.27 26.52,6.27, body extent -26.47,-6.27 26.57,6.28, height 13.6
C0603 [mm]
  rect 1.1x1 smd: 1(-0.9,0) 2(0.9,0)
  silkscreen extent -1.85,-0.8 1.85,0.8, body extent -0.76,-0.39 0.76,0.38, height 0.46
C0805 [mm]
  rect 1.2x1.5 smd: 1(-1,0) 2(1,0)
  silkscreen extent -1.95,-1 1.95,1, body extent -1.02,-0.64 1.02,0.64, height 0.61
C1206 [mm]
  rect 1.6x1.8 smd: 1(-1.4,0) 2(1.4,0)
  silkscreen extent -2.5,-1.2 2.5,1.2, body extent -1.52,-0.82 1.52,0.71, height 0.61
CAP-50V/470U [mm]
  rect 1.4x1.4 hole 0.8: 1(-2.5,0)
  round 1.4 hole 0.8: 2(2.5,0)
  silkscreen extent -6.05,-5 5,5, body extent -4.95,-5 5.04,5, height 20.1
CR2428 [mm]
  round 2.2 hole 1.1: 1(0,10) 2(0,-10)
  silkscreen extent -13,-18 13,11.51
CT7343-D [mm]
  rect 2.6x3 smd: 1(-3.2,0) 2(3.2,0)
  silkscreen extent -6.2,-2.2 4.9,2.55, body extent -3.75,-2.16 3.75,2.16, height 2.8
CT7343-E [mm]
  rect 2.6x3 smd: 1(-3.2,0) 2(3.2,0)
  silkscreen extent -6.25,-2.2 4.9,2.55, body extent -3.75,-2.2 3.75,2.12, height 4
DIP8 [mm]
  rect 1.5x1.5 hole 0.9: 1(-3.823,-3.836)
  round 1.5 hole 0.9: 2(-1.283,-3.836) 3(1.257,-3.836) 4(3.797,-3.836) 5(3.797,3.784) 6(1.257,3.784) 7(-1.283,3.784) 8(-3.823,3.784)
  silkscreen extent -5.16,-2.68 5.14,2.62
DO-218AB [mm]
  rect 9.3x12.5 smd: 1(0,0)
  rect 4x5 smd: 2(9.55,0)
  silkscreen extent -6.1,-6.73 13.72,6.6
DS1X2-2.54 [mm]
  rect 1.7x1.7 hole 1.1: 1(-1.27,0)
  round 1.7 hole 1.1: 2(1.27,0)
  silkscreen extent -3.72,-2.35 3.72,3.35, body extent -3.71,-2.36 3.73,3.34, height 7
DS1X4-2.54 [mm]
  rect 1.7x1.7 hole 1.1: 1(-3.81,0)
  round 1.7 hole 1.1: 2(-1.27,0) 3(1.27,0) 4(3.81,0)
  silkscreen extent -6.25,-2.34 6.27,3.36, body extent -6.31,-2.33 6.21,3.37, height 7
DS1X5-2.54 [mm]
  rect 1.7x1.7 hole 1.1: 1(-5.08,0)
  round 1.7 hole 1.1: 2(-2.54,0) 3(0,0) 4(2.54,0) 5(5.08,0)
  silkscreen extent -7.52,-2.34 7.54,3.36, body extent -7.53,-2.33 7.53,3.37, height 7
DS1X6-2.54 [mm]
  rect 1.7x1.7 hole 1.1: 1(-6.35,0)
  round 1.7 hole 1.1: 2(-3.81,0) 3(-1.27,0) 4(1.27,0) 5(3.81,0) 6(6.35,0)
  silkscreen extent -8.79,-2.34 8.81,3.36, body extent -8.79,-2.35 8.81,3.35, height 7
DS1X8-2.54 [mm]
  rect 1.7x1.7 hole 1.1: 1(-7.62,0)
  round 1.7 hole 1.1: 2(-5.08,0) 3(-2.54,0) 4(0,0) 5(2.54,0) 6(5.08,0) 7(7.62,0) 8(10.16,0)
  silkscreen extent -10.06,-2.34 12.62,3.4
DS1X10-2.54 [mm]
  rect 1.7x1.7 hole 1.1: 1(-11.43,0)
  round 1.7 hole 1.1: 2(-8.89,0) 3(-6.35,0) 4(-3.81,0) 5(-1.27,0) 6(1.27,0) 7(3.81,0) 8(6.35,0) 9(8.89,0) 10(11.43,0)
  silkscreen extent -13.88,-2.32 13.88,3.38, body extent -13.87,-2.29 13.89,3.41, height 7
F1812 [mm]
  rect 1.9x3.5 smd: 1(-2,0) 2(2,0)
  silkscreen extent -0.8,-1.7 0.8,1.7, body extent -2.29,-1.65 2.31,1.65, height 0.69
FFC/SM1.0-6 [mm]
  rect 2.54x3.08 smd: 0(-4.77,-1.6) 0(4.77,-1.6)
  rect 0.508x2.286 smd: 1(-2.47,1.6)
  oval 0.508x2.286 smd: 2(-1.47,1.6) 3(-0.47,1.6) 4(0.53,1.6) 5(1.53,1.6) 6(2.53,1.6)
  silkscreen extent -5.47,-3.73 5.01,0.3
FFC/SM1.0-8 [mil]
  rect 100x121.26 smd: 0(-229.17,-55.99) 0(225.16,-55.99)
  rect 20x90 smd: 1(-138.61,69.99)
  oval 20x90 smd: 2(-99.24,69.99) 3(-59.87,69.99) 4(-20.5,69.99) 5(18.87,69.99) 6(58.24,69.99) 7(97.61,69.99) 8(136.98,69.99)
  silkscreen extent -257,-140 267,19
HDR1X9 [mm] "Connector; Header; 9 Position"
  rect 1.5x1.5 hole 0.9: 1(0,0)
  round 1.5 hole 0.9: 2(2.54,0) 3(5.08,0) 4(7.62,0) 5(10.16,0) 6(12.7,0) 7(15.24,0) 8(17.78,0) 9(20.32,0)
  silkscreen extent -1.27,-1.27 21.59,1.27
HDR2X15 [mm] "Connector; Header; 15x2 Position"
  rect 1.5x1.5 hole 0.9: 1(0,0)
  round 1.5 hole 0.9: 2(0,2.54) 3(2.54,0) 4(2.54,2.54) 5(5.08,0) 6(5.08,2.54) 7(7.62,0) 8(7.62,2.54) 9(10.16,0) 10(10.16,2.54) 11(12.7,0) 12(12.7,2.54) 13(15.24,0) 14(15.24,2.54) 15(17.78,0) 16(17.78,2.54) 17(20.32,0) 18(20.32,2.54) 19(22.86,0) 20(22.86,2.54) 21(25.4,0) 22(25.4,2.54) 23(27.94,0) 24(27.94,2.54) 25(30.48,0) 26(30.48,2.54) 27(33.02,0) 28(33.02,2.54) 29(35.56,0) 30(35.56,2.54)
  silkscreen extent -1.27,-1.27 36.83,3.81
HT-M3#1 [mm]
  round 7 hole 3.3: 1(0,0)
HT-M3#2 [mm]
  round 7 hole 3.3: 1(27.32,4.53)
HT-M3#3 [mm]
  round 7 hole 3.3: 1(9.718,-7.425)
HT-M3#4 [mm]
  round 7 hole 3.3: 1(2.665,-12.556)
HT-M3#5 [mm]
  round 7 hole 3.3: 1(-12.984,0.079)
HT-M3#6 [mm]
  round 7 hole 3.3: 1(-2.506,5.774)
HT-M3#7 [mm]
  round 7 hole 3.3: 1(2.015,6.291)
HT-M3#8 [mm]
  round 7 hole 3.3: 1(-1.754,13.826)
HT-M3#9 [mm]
  round 7 hole 3.3: 1(6.343,-8.253)
HT-M3#10 [mm]
  round 7 hole 3.3: 1(-16.011,0.364)
L0603-C [mm]
  rect 1.1x1 smd: 1(-0.9,0) 2(0.9,0)
  silkscreen extent -1.45,-0.8 1.45,0.8, body extent -0.76,-0.39 0.76,0.38, height 0.46
L3030-P [mm]
  rect 1.6x3.1 smd: 1(-3.2,0) 2(3.2,0)
  silkscreen extent -3.8,-3.8 3.8,3.8, body extent -3.5,-3.55 3.5,3.45, height 4.36
L5050-P [mm]
  rect 3.8x5.4 smd: 1(-5.4,0) 2(5.4,0)
  silkscreen extent -6.35,-6.35 6.35,6.35, body extent -6.18,-5.97 6.12,6.33, height 6
LED0805 [mm]
  rect 1.2x1.5 smd: 1(-1.1,0) 2(1.1,0)
  silkscreen extent -2.9,-1.1 1.95,1.4, body extent -1.02,-0.64 1.02,0.64, height 0.56
R0603 [mm]
  rect 1.1x1 smd: 1(-0.9,0) 2(0.9,0)
  silkscreen extent -1.7,-0.8 1.7,0.8, body extent -0.79,-0.39 0.74,0.38, height 0.46
R0805 [mm]
  rect 1.2x1.4 smd: 1(-1,0) 2(1,0)
  silkscreen extent -2.05,-1.05 2.05,1.05, body extent -1.02,-0.65 1.02,0.62, height 0.61
SHD1X8-2.00 [mm]
  rect 1.2x1.2 hole 0.762: 1(-7,0)
  round 1.2 hole 0.762: 2(-5,0) 3(-3,0) 4(-1,0) 5(1,0) 6(3,0) 7(5,0) 8(7,0)
SMA [mm]
  rect 1.75x1.6 smd: 1(-1.925,0) 2(1.925,0)
  silkscreen extent -3.9,-1.5 2.8,1.85
SMA-S [mm]
  rect 1.75x1.6 smd: 1(-1.925,0) 2(1.925,0)
  silkscreen extent -2.3,-1.5 2.3,1.5, body extent -2.6,-1.33 2.6,1.33, height 2.15
SMC [mm]
  rect 2.5x3.2 smd: 1(-3.25,0) 2(3.25,0)
  silkscreen extent -5.5,-3.2 4.5,3.55, body extent -3.8,-3.1 3.8,3.12, height 2.8
SO16-150 [mm]
  rect 0.6x2.2 smd: 1(-4.445,-2.6) 2(-3.175,-2.6) 3(-1.905,-2.6) 4(-0.635,-2.6) 5(0.635,-2.6) 6(1.905,-2.6) 7(3.175,-2.6) 8(4.445,-2.6) 9(4.445,2.6) 10(3.175,2.6) 11(1.905,2.6) 12(0.635,2.6) 13(-0.635,2.6) 14(-1.905,2.6) 15(-3.175,2.6) 16(-4.445,2.6)
  silkscreen extent -5.42,-2.72 5,1.1, body extent -4.95,-2.92 5.02,3.02, height 1.35
SO-8 [mil]
  oval 90x24 smd: 1(0.04,0.29) 2(0.04,-49.71) 3(0.04,-99.71) 4(0.04,-149.71) 5(220.04,-149.71) 6(220.04,-99.71) 7(220.04,-49.71) 8(220.04,0.29)
  silkscreen extent 60,-175 160,25
SOT-23 [mm]
  rect 1x1.4 smd: 1(-0.95,-1.1) 2(0.95,-1.1) 3(0,1.1)
  silkscreen extent -1.47,-1.02 1.45,1, body extent -1.41,-1 1.38,1.42, height 1.09
SOT-223 [mm]
  rect 1.1x2.15 smd: 1(-2.3,-3.1) 2(0,-3.1) 3(2.3,-3.1)
  rect 3.5x2.15 smd: 4(0,3.1)
  silkscreen extent -3.35,-1.63 3.35,1.62, body extent -3.15,-3.3 3.15,3.3, height 1.8
STM32F103VCT6 [mil]
  rect 90x11.5 smd: 1(-303.15,236.22)
  oval 90x11.5 smd: 2(-303.15,216.54) 3(-303.15,196.85) 4(-303.15,177.17) 5(-303.15,157.48) 6(-303.15,137.8) 7(-303.15,118.11) 8(-303.15,98.43) 9(-303.15,78.74) 10(-303.15,59.06) 11(-303.15,39.37) 12(-303.15,19.69) 13(-303.15,0) 14(-303.15,-19.68) 15(-303.15,-39.37) 16(-303.15,-59.05) 17(-303.15,-78.74) 18(-303.15,-98.42) 19(-303.15,-118.11) 20(-303.15,-137.8) 21(-303.15,-157.48) 22(-303.15,-177.16) 23(-303.15,-196.85) 24(-303.15,-216.53) 25(-303.15,-236.22) 51(303.15,-236.22) 52(303.15,-216.53) 53(303.15,-196.85) 54(303.15,-177.16) 55(303.15,-157.48) 56(303.15,-137.8) 57(303.15,-118.11) 58(303.15,-98.42) 59(303.15,-78.74) 60(303.15,-59.05) 61(303.15,-39.37) 62(303.15,-19.68) 63(303.15,0) 64(303.15,19.69) 65(303.15,39.37) 66(303.15,59.06) 67(303.15,78.74) 68(303.15,98.43) 69(303.15,118.11) 70(303.15,137.8) 71(303.15,157.48) 72(303.15,177.17) 73(303.15,196.85) 74(303.15,216.54) 75(303.15,236.22)
  oval 11.5x90 smd: 26(-236.22,-303.15) 27(-216.54,-303.15) 28(-196.85,-303.15) 29(-177.17,-303.15) 30(-157.48,-303.15) 31(-137.8,-303.15) 32(-118.11,-303.15) 33(-98.43,-303.15) 34(-78.74,-303.15) 35(-59.06,-303.15) 36(-39.37,-303.15) 37(-19.69,-303.15) 38(0,-303.15) 39(19.68,-303.15) 40(39.37,-303.15) 41(59.05,-303.15) 42(78.74,-303.15) 43(98.42,-303.15) 44(118.11,-303.15) 45(137.79,-303.15) 46(157.48,-303.15) 47(177.16,-303.15) 48(196.85,-303.15) 49(216.53,-303.15) 50(236.22,-303.15) 76(236.22,303.15) 77(216.53,303.15) 78(196.85,303.15) 79(177.16,303.15) 80(157.48,303.15) 81(137.79,303.15) 82(118.11,303.15) 83(98.42,303.15) 84(78.74,303.15) 85(59.05,303.15) 86(39.37,303.15) 87(19.68,303.15) 88(0,303.15) 89(-19.69,303.15) 90(-39.37,303.15) 91(-59.06,303.15) 92(-78.74,303.15) 93(-98.43,303.15) 94(-118.11,303.15) 95(-137.8,303.15) 96(-157.48,303.15) 97(-177.17,303.15) 98(-196.85,303.15) 99(-216.54,303.15) 100(-236.22,303.15)
  silkscreen extent -319,-319 319,319
SW-MEC [mil]
  round 80 hole 46: 1(-201.58,150) 1(201.57,150) 2(-201.58,-150) 2(201.57,-150)
  silkscreen extent -210,-158 215,192, body extent -202,-200 211,194, height 395
SW-MEC-5 [mil]
  round 80 hole 46: 1(-202.95,638.19) 1(202.95,638.19) 2(-202.95,338.98) 2(202.95,338.98) 3(-202.95,-638.19) 3(202.95,-638.19) 4(-202.95,-338.98) 4(202.95,-338.98) 5(644.29,-196.46) 5(644.29,196.46) 6(339.37,-196.46) 6(339.37,196.46) 7(-644.29,-196.46) 7(-644.29,196.46) 8(-339.37,-196.46) 8(-339.37,196.46) 9(-202.95,150) 9(202.95,150) 10(-202.95,-150) 10(202.95,-150)
  silkscreen extent -686,-627 680,664, body extent -690,-688 687,688, height 457
TO-252 [mm] "DPAK"
  rect 1.2x2.28 smd: 1(-2.29,0) 3(2.29,0)
  rect 6x6.23 smd: 2(0,7.64)
  silkscreen extent -3.29,2.51 3.31,8.7, body extent -3.35,-0.29 3.35,9.72, height 2.3
TSSO3X5-G10 [mm]
  rect 1.6x0.3 smd: 1(-2.05,1) 2(-2.05,0.5) 3(-2.05,0) 4(-2.05,-0.5) 5(-2.05,-1) 6(2.05,-1) 7(2.05,-0.5) 8(2.05,0) 9(2.05,0.5) 10(2.05,1)
  rect 1.45x1.8 smd: 11(0,0)
  silkscreen extent -2.18,-1.58 0.85,2.12
"XTAL 5.0X7.0-SM" [mm]
  rect 1.5x2 smd: 1(-2.5,-2.1) 2(2.5,-2.1) 3(2.5,2.1) 4(-2.5,2.1)
  silkscreen extent -4.5,-2.65 3.7,2.65, body extent -3.55,-2.55 3.45,2.45, height 1.5

## Part data
C1 C2 C10 C11 C12 C13 C14 C16 C17 C18 C19 C20 C21 C22 C23 C24 C25 C26 C78 C80 C81 C82 C87 C88 C89 C90 C91 C92 C94 C95 C96 C97 C98 C99 C100 C101 C102 C103 C104 C105 C106 C108 C110 C112 C113 C114 C115 C116 C117 C118 C119 C120 C121: library part CAP, "CAP"
C3: library part Cap, "CAP, CERAMIC, 15nF, 16V, X5R, 0603"
C4 C9: library part Cap, "CAP, CERAMIC, 0.1UF, 16V, X5R, 0603"
C5 C77 C83 C84: library part ELECTRO, "Electrolytic Capacitor"
C6 C7 C27 C28 C29 C30 C31 C32 C33 C34 C35 C36 C37 C38 C39 C40 C41 C42 C43 C44 C45 C46 C47 C48 C49 C50 C51 C52 C53 C54 C55 C56 C57 C58 C59 C60 C61 C62 C63 C64 C65 C66 C67 C68 C69 C70 C71 C72 C73 C74 C79 C85 C86 C93 C107 C109 C111: library part Cap, "Capacitor"
C8: library part "Cap Pol1", "Polarized Capacitor (Radial)"
C15: library part CAP-ELECTRO, "Electrolytic Capacitor"
D1 D2 D3 D4 D5 D6 D56 D58: library part DIODE-ZENER, "Small Signal Zener Diodes"
D7: library part "DIODE SCHOTTKY_1"
D8 D9: library part DIODE-SWITCHING, "Silicon Epitaxial Planar Diodes"
D10 D11 D12 D13 D14 D15 D16 D17 D18 D19 D20 D21 D22 D23 D24 D25 D26 D27 D28 D29 D30 D31 D32 D33 D34 D35 D36 D37 D38 D39 D40 D41 D42 D43 D44 D45 D46 D47 D48 D49 D50 D51 D52 D53 D57 D59: library part DIODE1, "Diode"
D60 D61: library part LED
D62 D63 D64: library part P0080_1
F1 F2 F3 F4: library part FUSE2, "Fuse"
IC1: library part MAX232ACPE, "+5V Powered, Multi-Channel RS-232 Driver/Receiver"
IC2 IC3 IC4: library part SP3078EEN
J2: library part HEADER1X8
K_H1 K_H2 K_H3 K_H4 K_H5: library part SW-key
L1 L2 L3: library part Inductor, "Inductor"
L4: library part INDUCTOR, "INDUCTOR"
P1 P9 P10 P20: "Header, 6-Pin"
P2 P3: library part "Header 9", "Header, 9-Pin"
P6 P23 P25: "Header, 8-Pin"
P11: library part "Header 5", "Header, 5-Pin"
P12 P14 P15 P18 P19: library part "Header 2", "Header, 2-Pin"
P13: library part "Header 4", "Header, 4-Pin"
P16 P21: "Header, 10-Pin"
P17: library part "Header 8", "Header, 8-Pin"
P22: "Connector"
P24: "Header, 4-Pin"
PA1 PB1: "Header, 15-Pin, Dual row"
Q1 Q2: library part NPN, "NPN General Purpose Amplifier"
R0 R97 R98 R99 R100 R101 R103: library part Res, "Resistor"
R1 R2 R3 R4 R5 R6 R7 R8 R9 R10 R11 R12: library part Res1, "Resistor"
R13 R14 R15 R16 R17 R18 R19 R20 R21 R22 R23 R24 R25 R26 R27 R28 R29 R30 R31 R32 R33 R34 R35 R36 R37 R38 R39 R40 R41 R42 R43 R44 R45 R46 R47 R48 R49 R50 R51 R52 R53 R54 R55 R56 R57 R58 R59 R60 R61 R62 R63 R64 R65 R66 R67 R68 R69 R70 R71 R72 R73 R74 R75 R76 R77 R78 R79 R80 R81 R82 R83 R84 R85 R86 R87 R88 R89 R90 R91 R92 R93 R94 R95 R96 R102 R104 R105 R106 R107 R108 R109 R110 R111 R112 R113 R114 R115 R116 R117 R118 R119 R120 R121 R122 R123: library part RES, "Resistor"
U2: library part MC78MXX, "3-Terminal 0.5A Positive Voltage Regulator"
U3: library part REF192/5/7
U4: "2W功放芯片"
Y1: library part XTAL

## Via types
v1: diameter 30, hole 18, Top Layer to Bottom Layer, tented both sides, 57 vias
v2: diameter 28, hole 18, Top Layer to Bottom Layer, tented both sides, 10 vias
v3: diameter 24, hole 16, Top Layer to Bottom Layer, tented both sides, 5 vias

## Nets (pads, with @x,y where several pads share a name; then routed paths per layer and width w, separated by ;. In a path a pad name is that pad's centre, name@x,y a point inside that pad or via, vN(x,y) a via of type N, cw(c..) or ccw(c..) an arc to the next point about the centre after c; other vN are vias at no path point)
+2.5V_S: C15.1 C21.2 C24.2 C26.2 C67.1 C68.1 C69.1 C70.1 C90.1 C91.1 C94.1 P9.6 P10.6 U3.6 U5.21 | length 551
  Top Layer w20: P9.6@1074.99,1346.39 1074.99,1152.38 C68.1@1080,1147.37 ; C67.1@8569.34,1705.66 8659.34,1705.66 C69.1@8661,1704 8661,1556.6 P10.6@8654.01,1549.61
  Top Layer w30: C70.1@981,1144.37 1077,1144.37 C68.1@1080,1147.37
+3.3V_A: C99.2 C101.2 C103.2 L4.2 U5.22
+3.3V_S: C20.1 C25.2 C92.2 C93.2 C95.2 C96.1 C97.1 C98.1 C100.1 C102.1 C104.1 C108.1 C110.2 C112.2 C113.2 C114.2 C115.2 C116.2 C117.2 C118.2 C119.2 C120.2 C121.2 D60.1 D61.1 IC1.16 IC2.8 IC3.8 IC4.8 J2.1 L4.1 R0.1 R13.2 R14.2 R15.2 R16.2 R17.2 R23.2 R24.2 R25.2 R26.2 R31.2 R32.2 R33.2 R34.2 R39.2 R40.2 R41.2 R42.2 R47.2 R48.2 R49.2 R50.2 R55.2 R56.2 R59.2 R60.2 R61.2 R65.2 R66.2 R67.2 R71.2 R72.2 R73.2 R77.2 R78.2 R79.2 R85.2 R86.2 R89.2 R90.2 R93.2 R109.1 R112.1 R115.1 U2.3 U5.11 U5.28 U5.50 U5.75 U5.100 Y1.4 | length 2853.7
  Top Layer w30: R73.2@-518.37,-171 v2(-518.37,-260.63) v2@-518,-261 ; v2(-224.37,506.37) R56.2@-133,506.37 ; v2(-191,24) -190.37,23.37 R79.2@-127,23.37 ; v1@46,-2807 v1(46.63,-2807.63) R17.2@125,-2807.63 ; v2@52,-1479 v2(52.63,-1479.63) R14.2@151,-1479.63 ; v2(55,-2368) 55.63,-2368.63 R16.2@149,-2368.63 ; v2(93,-1031) 93.37,-1030.63 R13.2@152,-1030.63 ; R61.2@132,-530.37 233.63,-530.37 v2(234,-530) ; v2(512,226) 512.37,225.63 R67.2@512.37,140 ; v1(1416,-2656) 1416.37,-2655.63 R34.2@1481,-2655.63 ; v1(1418,-3193) 1419.63,-3194.63 R50.2@1481,-3194.63 ; v1@1419,-1850 v1(1419.63,-1850.63) R41.2@1481,-1850.63 ; v1(1420,-2928) 1420.37,-2927.63 R42.2@1481,-2927.63 ; v1(1420,-2387) 1420.37,-2386.63 R26.2@1481,-2386.63 ; v1@1420,-2117 v1(1420.37,-2116.63) R49.2@1481,-2116.63 ; v1@1420,-1584 v1(1420.37,-1583.63) R33.2@1481,-1583.63 ; v1(1422,-1317) 1422.37,-1316.63 R25.2@1481,-1316.63 ; R59.2@8213,1706.37 v1(8277.37,1706.37) v1@8278,1707 ; R65.2@8213,1993.37 8282.63,1993.37 v1(8284,1992) ; R71.2@8213,2263.37 8213.63,2264 v1(8276,2264) ; R77.2@8213,2549.37 8282.63,2549.37 v1(8283,2549) ; R93.2@8214,1434.37 8276.63,1434.37 v1(8279,1432) ; R89.2@8220,1157.37 8287.63,1157.37 v1(8288,1157) ; R85.2@8224,880.37 8262.63,919 v1(8290,919) ; R112.1@8294.37,-3158 8378.37,-3158 C114.2@8392,-3144.37 ; v1(8600,-198) 8600,-265 8620,-285 8620,-285.63 R24.2@8643,-308.63 ; v1(8603,78) 8603,52 8641,14 R47.2@8641,-35.63 ; R48.2@8643,-1117.63 8713.37,-1117.63 v1(8715,-1116) ; R40.2@8643,-842.63 8643,-816 8669,-790 v1(8710,-790) ; R32.2@8643,-571.63 8662.63,-571.63 8681,-590 v1(8717,-590) ; R39.2@8643,232.37 8705.37,232.37 v1(8708,235) ; R31.2@8643,505.37 8710.63,505.37 v1(8711,505) ; R23.2@8643,768.37 8711.63,768.37 v1(8712,768) ; v1(9433.63,-202.37) R72.2@9433.63,-135 ; v1(9687,-510) 9689.63,-507.37 R60.2@9777,-507.37 ; v1(9719,23) 9719.63,22.37 R78.2@9781,22.37 ; R55.2@10069,507.37 10129.63,507.37 v1(10131,506)
+5V_S: C8.1 C9.1 C10.2 C11.1 C12.2 C13.2 C14.2 L1.2 P23.2 R6.2 R8.2 U2.1 U3.2 U3.3